# Altium PCB PCB1.PcbDoc
Units mil, origin at the board's own origin, x right, y up, seen from the top; angles counter-clockwise.
Board outline 3937.01 x 3937.01 mil, 2 copper layers (Top Layer, Bottom Layer); 44 components, 36 nets, 195 pads, 3 vias.
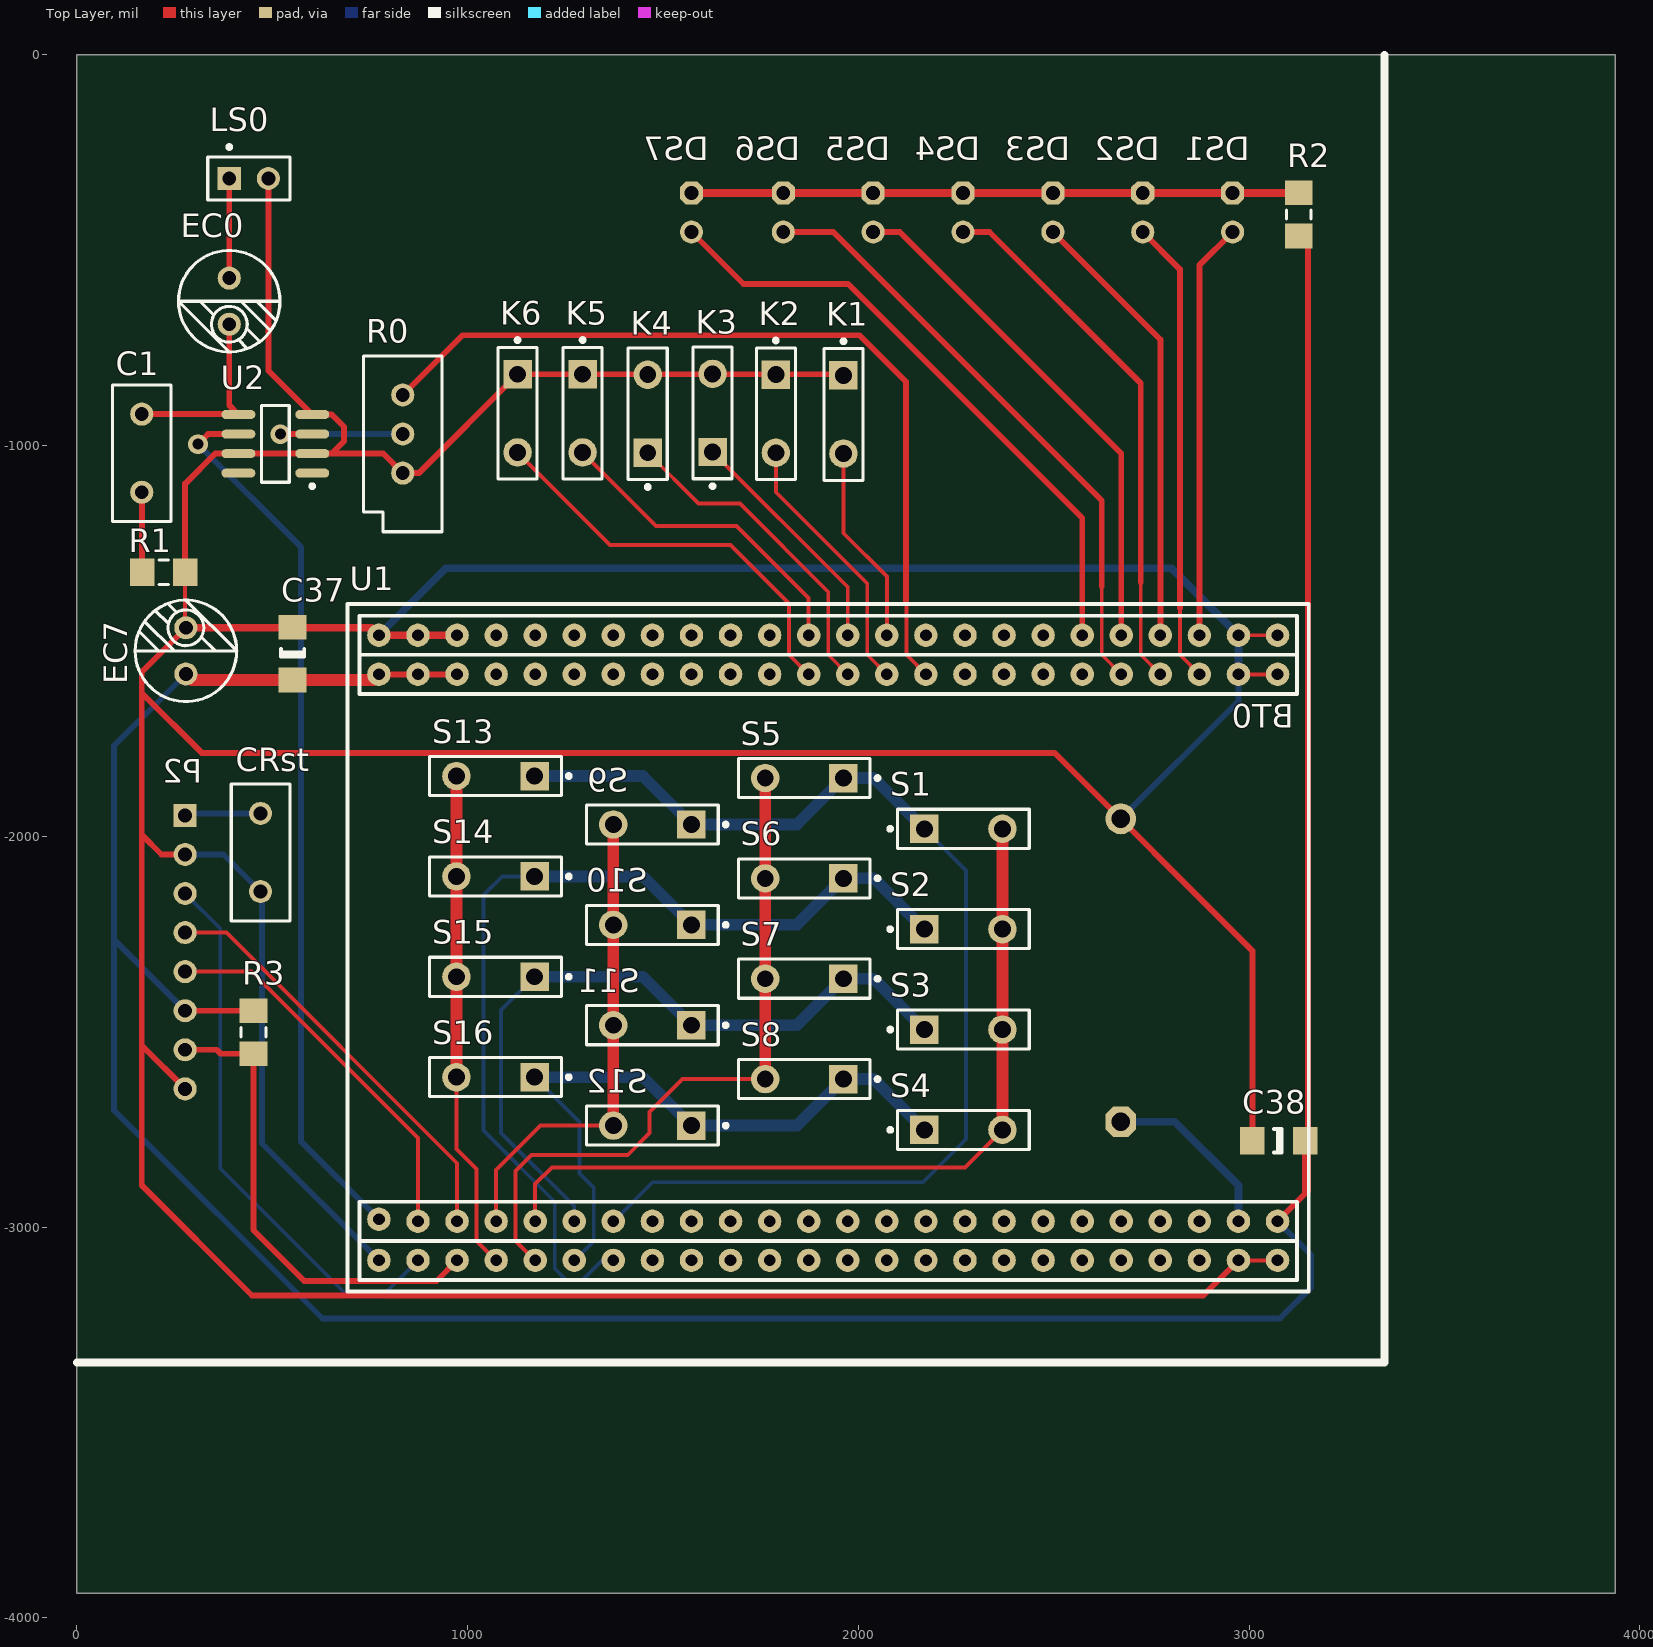
[diagram p0: Top Layer view]
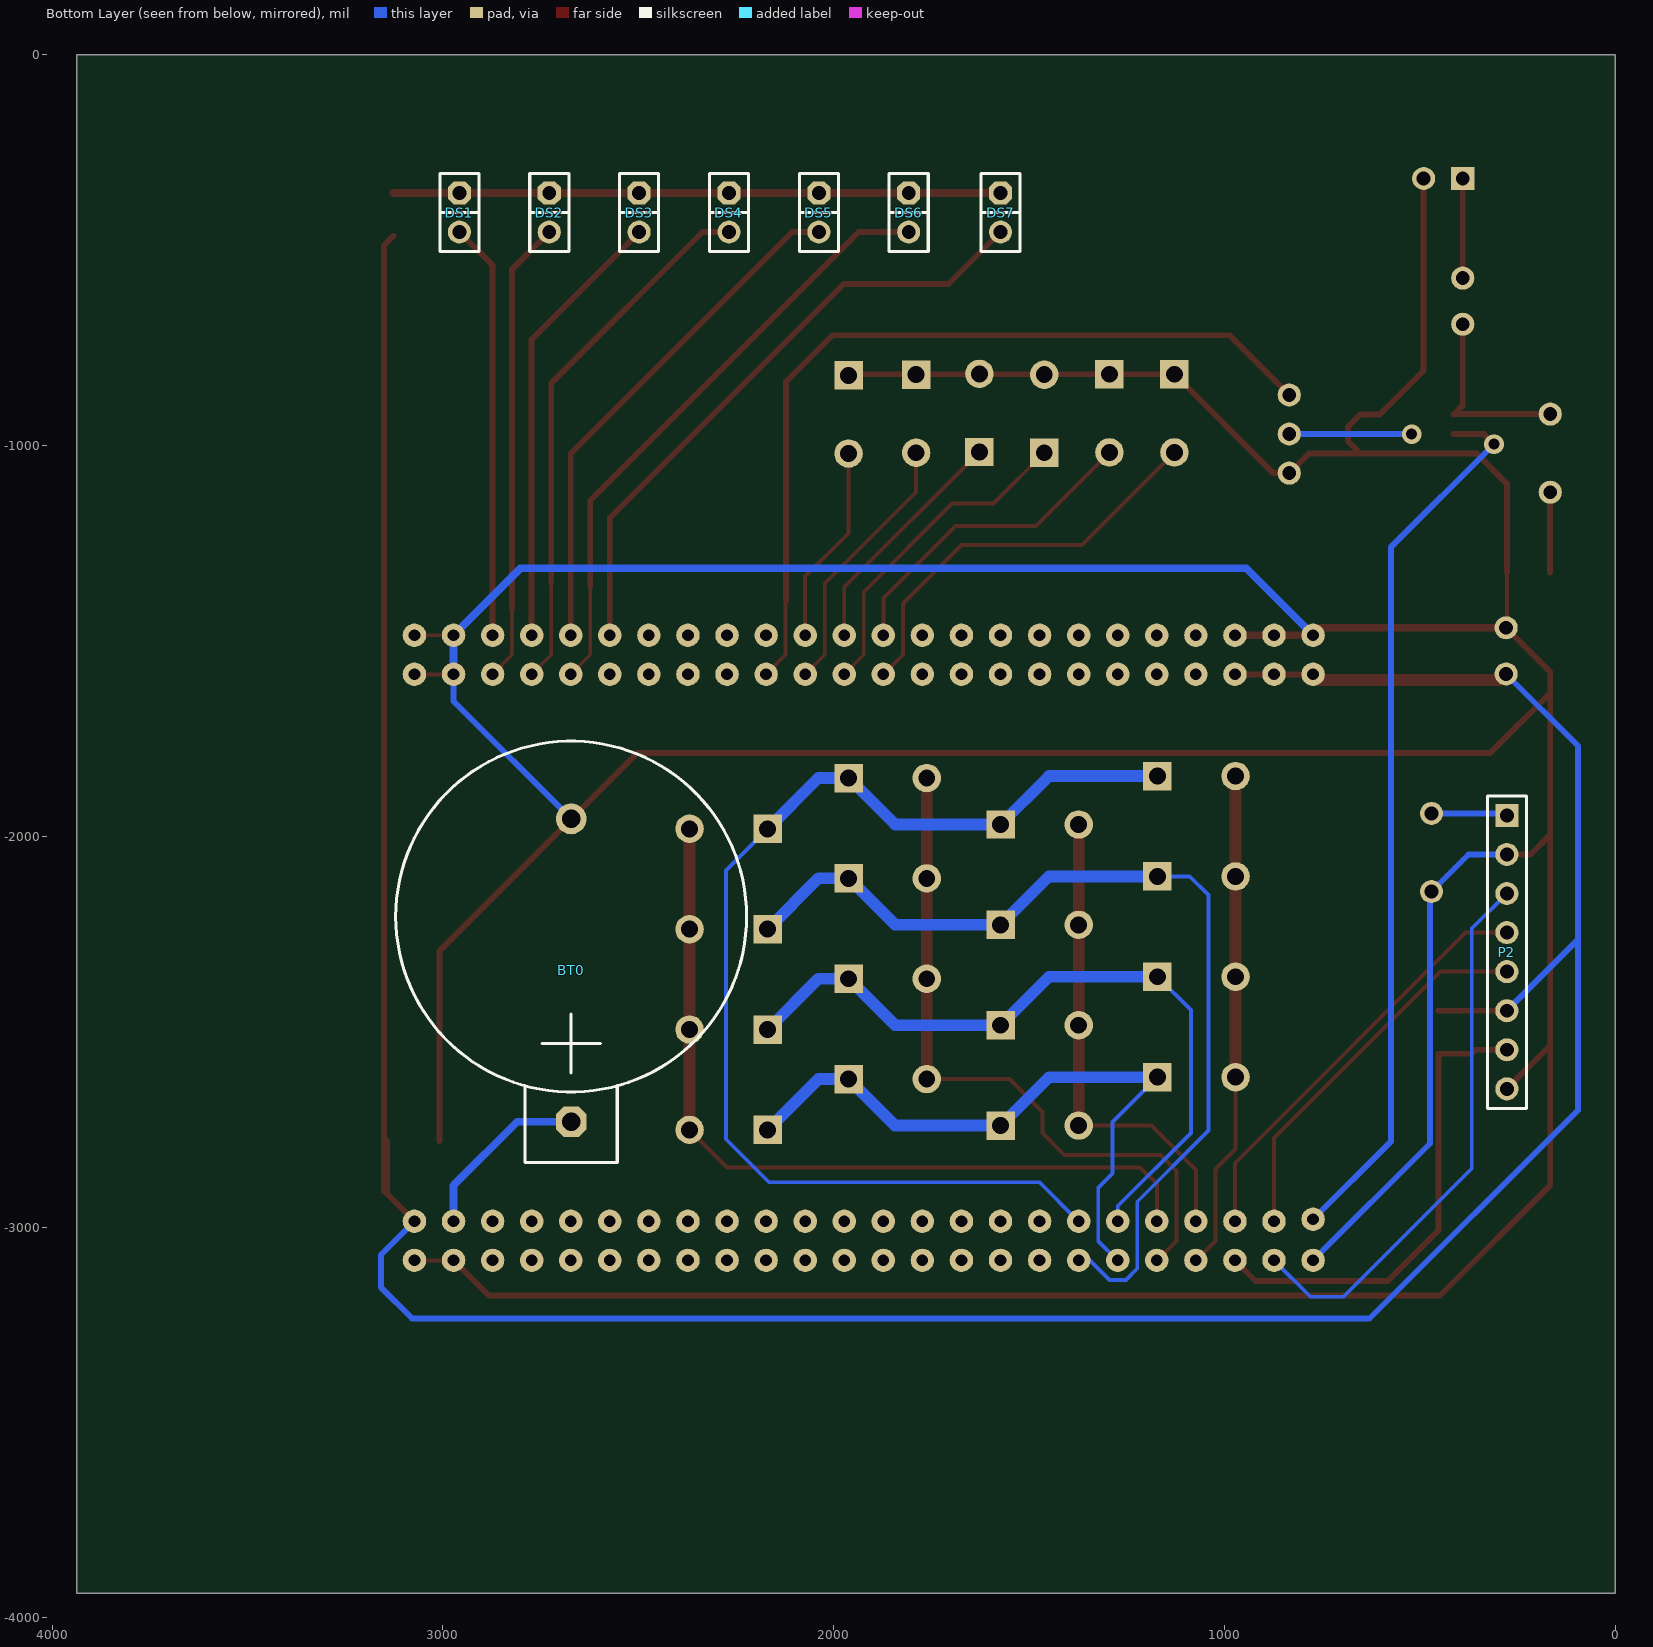
[diagram p1: Bottom Layer view, seen from below]

## Layer stack, top to bottom
Top Layer: signal copper 1.4
Dielectric: dielectric 12.6, FR-4, Dk 4.8
Bottom Layer: signal copper 1.4

## Board outline
0,0 0,-3937.01 3937.01,-3937.01 3937.01,0

## Design rules (kind name [scope] priority, off if disabled: settings)
Clearance [All] p1: gap=15
PolygonConnect [All] p1: connectstyle=Relief reliefconductorwidth=10 reliefentries=4 polygonreliefangle="90 Angle" airgapwidth=10
RoutingVias [All] p1: holewidth=28 width=50 viastyle="Through Hole" minholewidth=28 minwidth=50 maxholewidth=28 maxwidth=50
SolderMaskExpansion [All] p1: expansion=4
Width [All] p1: maxlimit=100 minlimit=10 preferedwidth=15
Width Width_1 [InNet('+5')] p2: maxlimit=100 minlimit=10 preferedwidth=30
Width Width_2 [InNet('+3')] p3: maxlimit=100 minlimit=10 preferedwidth=30
28 further rules are at their usual default settings.

## Components (designator, comment, footprint, x,y, rotation, side; value= is the part's Value field where it differs from the comment)
BT0 "Battery" CR2032 2672,-2730.41 r90 bottom
C1 "0.051uf" RAD-0.2 166,-919.41 r270 top
C37 "0.1uF" CC3216 552,-1532.41 r90 top
C38 "0.1uF" CC3216 3076,-2779.41 r180 top
CRst "104" RAD-0.2 470,-2141.41 r90 top
DS1 "LED" LED-2 2958,-403.41 r270 bottom
DS2 "LED" LED-2 2728,-403.41 r270 bottom
DS3 "LED" LED-2 2498,-403.41 r270 bottom
DS4 "LED" LED-2 2268,-403.41 r270 bottom
DS5 "LED" LED-2 2038,-403.41 r270 bottom
DS6 "LED" LED-2 1808,-403.41 r270 bottom
DS7 "LED" LED-2 1573,-403.41 r270 bottom
EC0 "220uF/16V" RB3.0 390,-630.41 r90 top
EC7 "220uF/16V" RB3.0 279,-1525.41 r270 top
K1 "UP" SPST-2 1962,-920.41 r270 top
K2 "DOWD" SPST-2 1789,-918.41 r270 top
K3 "LEFT" SPST-2 1627,-916.41 r90 top
K4 "RIGHT" SPST-2 1461,-918.41 r90 top
K5 "ESC" SPST-2 1294.3,-917.41 r270 top
K6 "OK" SPST-2 1127.88,-917.41 r270 top
LS0 "Speaker" PIN2 390,-316.41 r0 top
P2 "NOKIA5110" HDR1X8 277,-1946.41 r270 bottom
R0 "10K" VR-3296 834,-1070.41 r270 top
R1 "10Ω" CR1206 222,-1324.41 r0 top
R2 "470Ω" CR1206 3127,-408.41 r90 top
R3 "10k" CR1206 452,-2501.41 r270 top
S1 "SW-PB" SPST-2 2269,-1980.84 r0 top
S2 "SW-PB" SPST-2 2269,-2237.7 r0 top
S3 "SW-PB" SPST-2 2269,-2494.55 r0 top
S4 "SW-PB" SPST-2 2269,-2751.41 r0 top
S5 "SW-PB" SPST-2 1861.82,-1850.84 r180 top
S6 "SW-PB" SPST-2 1861.82,-2107.7 r180 top
S7 "SW-PB" SPST-2 1861.82,-2364.55 r180 top
S8 "SW-PB" SPST-2 1861.82,-2621.41 r180 top
S9 "SW-PB" SPST-2 1473,-1969.84 r180 top
S10 "SW-PB" SPST-2 1473,-2226.7 r180 top
S11 "SW-PB" SPST-2 1473,-2483.55 r180 top
S12 "SW-PB" SPST-2 1473,-2740.41 r180 top
S13 "SW-PB" SPST-2 1071.49,-1845.84 r180 top
S14 "SW-PB" SPST-2 1071.49,-2102.7 r180 top
S15 "SW-PB" SPST-2 1071.49,-2359.55 r180 top
S16 "SW-PB" SPST-2 1071.49,-2616.41 r180 top
U1 "STM32F103RCT6" STM32F103RCT6 3073,-2985.41 r90 top (schematic designator U?)
U2 "LM386M-1" M08A_N 508,-995.41 r180 top

## Footprints (in the part's own frame and the unit in brackets; to place one, negate y for a bottom-side part, rotate by r counter-clockwise, add the part's x,y. Pads: shape width x height; smd on the part's side, far side on the other; paste and mask are expansions set on the pad)
CC3216 [mm]
  rect 1.6x1.8 smd: 1(-1.714,0) 2(1.714,0)
  silkscreen extent -0.19,-0.76 0.32,0.76
CR1206 [mm] "Chip Resistor; Body 3.2 x 1.6 mm (LxW typ)"
  rect 1.6x1.8 smd: 1(-1.4,0) 2(1.4,0)
  silkscreen extent -0.3,-0.8 0.3,0.8
CR2032 [mm]
  oct 2x2 hole 1.2: 1(0,0)
  round 2 hole 1.2: 2(19.685,0)
  silkscreen extent -2.67,-11.4 24.74,11.4
HDR1X8 [mm] "Connector; Header; 8 Position"
  rect 1.5x1.5 hole 0.9: 1(0,0)
  round 1.5 hole 0.9: 2(2.54,0) 3(5.08,0) 4(7.62,0) 5(10.16,0) 6(12.7,0) 7(15.24,0) 8(17.78,0)
  silkscreen extent -1.27,-1.27 19.05,1.27
LED-2 [mm]
  oct 1.5x1.5 hole 0.9: 1(-1.27,0)
  round 1.5 hole 0.9: 2(1.27,0)
  silkscreen extent -2.54,-1.27 2.54,1.27
M08A_N [mm] "SOIC, 8-Leads, Body 4.9x3.9mm, Pitch 1.27mm, IPC Medium Density"
  oval 2.2x0.6 smd: 1(-2.4,1.905) 2(-2.4,0.635) 3(-2.4,-0.635) 4(-2.4,-1.905) 5(2.4,-1.905) 6(2.4,-0.635) 7(2.4,0.635) 8(2.4,1.905)
  silkscreen extent -2.53,-2.5 0.9,2.88, body extent -2,-2.5 2,2.5, height 1.75
PIN2 [mm] "Photosensitive Diode; 2 Leads"
  rect 1.5x1.5 hole 0.9: 1(0,0)
  round 1.5 hole 0.9: 2(2.54,0)
  silkscreen extent -1.4,-1.4 3.94,2.17
RAD-0.2 [mm]
  round 1.5 hole 0.9: 1(0,0) 2(5.08,0)
  silkscreen extent -1.91,-1.91 6.98,1.91
RB3.0 [mm]
  round 1.5 hole 0.9: 1(1.5,0) 2(-1.5,0)
  silkscreen extent -3.3,-3.3 3.3,3.3
SPST-2 [mm] "Switch; 2 Leads"
  rect 1.85x1.85 hole 1.1: 1(-2.54,0)
  round 1.85 hole 1.1: 2(2.54,0)
  silkscreen extent -4.89,-1.27 4.28,1.27
STM32F103RCT6 [mil]
  round 60 hole 30: 1(0,0) 2(-100,0) 3(0,100) 4(-100,100) 5(0,200) 6(-100,200) 7(0,300) 8(-100,300) 9(0,400) 10(-100,400) 11(0,500) 12(-100,500) 13(0,600) 14(-100,600) 15(0,700) 16(-100,700) 17(0,800) 18(-100,800) 19(0,900) 20(-100,900) 21(0,1000) 22(-100,1000) 23(0,1100) 24(-100,1100) 25(0,1200) 26(-100,1200) 27(0,1300) 28(-100,1300) 29(0,1400) 30(-100,1400) 31(0,1500) 32(-100,1500) 33(0,1600) 34(-100,1600) 35(0,1700) 36(-100,1700) 37(0,1800) 38(-100,1800) 39(0,1900) 40(-100,1900) 41(0,2000) 42(-100,2000) 43(0,2100) 44(-100,2100) 45(0,2200) 46(-100,2200) 47(5,2300) 48(-100,2300) 49(1500,0) 50(1400,0) 51(1500,100) 52(1400,100) 53(1500,200) 54(1400,200) 55(1500,300) 56(1400,300) 57(1500,400) 58(1400,400) 59(1500,500) 60(1400,500) 61(1500,600) 62(1400,600) 63(1500,700) 64(1400,700) 65(1500,800) 66(1400,800) 67(1500,900) 68(1400,900) 69(1500,1000) 70(1400,1000) 71(1500,1100) 72(1400,1100) 73(1500,1200) 74(1400,1200) 75(1500,1300) 76(1400,1300) 77(1500,1400) 78(1400,1400) 79(1500,1500) 80(1400,1500) 81(1500,1600) 82(1400,1600) 83(1500,1700) 84(1400,1700) 85(1500,1800) 86(1400,1800) 87(1500,1900) 88(1400,1900) 89(1500,2000) 90(1400,2000) 91(1500,2100) 92(1400,2100) 93(1500,2200) 94(1400,2200) 95(1500,2300) 96(1400,2300)
  silkscreen extent -180,-80 1580,2380
VR-3296 [mm]
  round 1.5 hole 0.9: 1(0,0) 2(-2.54,0) 3(-5.08,0)
  silkscreen extent -7.62,-2.54 3.81,2.54

## Part data
BT0: library part CR2032
C1 C37 C38 CRst: library part Cap, "Capacitor"
EC0 EC7: library part "Cap Pol1", "Polarized Capacitor (Radial)"
K1 K2 K3 K4 K5 K6: library part SW-PB, "Switch"
LS0: "Loudspeaker"
P2: library part "Header 8", "Header, 8-Pin"
R0: library part Pot, "Potentiometer"
R1 R2 R3: library part Res2, "Resistor"
S1 S2 S3 S4 S5 S6 S7 S8 S9 S10 S11 S12 S13 S14 S15 S16: "Switch"
U1: library part STM32F103RC
U2: "Low Voltage Audio Power Amplifier"

## Via types
v1: diameter 50, hole 28, Top Layer to Bottom Layer, 3 vias

## Nets (pads, with @x,y where several pads share a name; then routed paths per layer and width w, separated by ;. In a path a pad name is that pad's centre, name@x,y a point inside that pad or via, vN(x,y) a via of type N, cw(c..) or ccw(c..) an arc to the next point about the centre after c; other vN are vias at no path point)
+3: C37.1 C38.1 EC7.1 P2.6 R2.1 R3.1 U1.1 U1.92 U1.94 U1.96 | length 8631.6
  Top Layer w15: P2.6 452,-2446.41 R3.1 ; U1.96 U1.94 U1.92 ; R2.1 3151,-487.53 3151,-2907.41 U1.1 3143.5,-2914.91 C38.1
  Top Layer w30: EC7.1@294.5,-1599.91 C37.1 758.5,-1599.91 U1.96
  Bottom Layer w15: P2.6 95.59,-2265 95,-2265 ; EC7.1 95,-1768.47 95,-2265 ; U1.1 3159,-3071.41 3159,-3154.41 3079,-3234.41 628.41,-3234.41 95,-2701 95,-2265
  other v1: 279,-1584.41
+5: U1.47 U2.6 | length 2290.1
  Top Layer w15: v1(310,-996.41) 336,-970.41 U2.6
  Bottom Layer w15: v1(310,-996.41) 574,-1260.41 574,-2781.41 U1.47
BL: P2.7 R3.2 U1.44 | length 1227.2
  Top Layer w15: P2.7 358,-2546.41 368.12,-2556.53 R3.2 452,-3008 581.91,-3137.91 920.5,-3137.91 U1.44
CLK: P2.5 U1.45 | length 985.6
  Top Layer w10: P2.5 447.33,-2346.41 873,-2772.08 U1.45
DC: P2.3 U1.46 | length 1421.4
  Bottom Layer w10: P2.3 367,-2236.41 367,-2850 695.41,-3178.41 780,-3178.41 U1.46
DIN: P2.4 U1.43 | length 1089.2
  Top Layer w10: P2.4 382.69,-2246.41 973,-2836.72 U1.43
GND: BT0.2 C37.2 C38.2 CRst.1 EC7.2 K1.1 K2.1 K3.2 K4.2 K5.1 K6.1 LS0.2 P2.2 P2.8 R0.1 R1.2 U1.2 U1.4 U1.48 U1.49 U1.50 U1.51 U1.52 U1.91 U1.93 U1.95 U2.2 U2.4 U2.7 | length 16703.7
  Top Layer w10: R1.2 277.12,-1464.47 EC7.2 ; U1.4 U1.2 ; U1.52 U1.50 ; U1.51 U1.49
  Top Layer w15: 166,-1996 216.41,-2046.41 P2.2 ; 168,-1635 319.41,-1786.41 2502,-1786.41 3008.5,-2292.91 C38.2 ; P2.8 166,-2535.41 ; R1.2 277.12,-1097.29 354,-1020.41 U2.7 U2.2 652,-1020.41 ; EC7.2 166,-1579.35 166,-2535.41 ; LS0.2 490,-807.92 U2.4 652,-920.41 684,-952.41 684,-988.41 652,-1020.41 ; C37.2 652,-1464.91 ; K1.1 1959,-817.41 K5.1 K6.1 874.88,-1070.41 R0.1 784,-1020.41 652,-1020.41 ; U1.4 2883,-3175.41 448,-3175.41 166,-2893.41 166,-2535.41
  Top Layer w20: EC7.2 753.94,-1466.35 U1.95 U1.93 U1.91
  Bottom Layer w15: P2.2 375,-2046.41 CRst.1 474,-2145.41 474,-2786.41 U1.48 ; BT0.2 2973,-1654.41 U1.52
  Bottom Layer w20: U1.95 944.41,-1314 2801.59,-1314 U1.51 U1.52
K_DOWN: K2.2 U1.70 | length 684.6
  Top Layer w10: K2.2 1789,-1119.41 2023,-1353.41 2023,-1535.41 U1.70
K_ESC: K5.2 U1.73 | length 828.4
  Top Layer w10: K5.2 1482.3,-1205.41 1688.41,-1205.41 1873,-1390 U1.73
K_LEFT: K3.1 U1.71 | length 612.3
  Top Layer w10: K3.1 1973,-1362.41 U1.71
K_OK: K6.2 U1.74 | length 1057.1
  Top Layer w10: K6.2 1364.88,-1254.41 1673,-1254.41 1823,-1404.41 1823,-1535.41 U1.74
K_RIGHT: K4.1 U1.72 | length 841.2
  Top Layer w10: K4.1 1591,-1148.41 1697,-1148.41 1923,-1374.41 1923,-1535.41 U1.72
K_UP: K1.2 U1.69 | length 511
  Top Layer w10: K1.2 1962,-1224.41 2073,-1335.41 U1.69
NetBT0_1: BT0.1 U1.3 | length 460.5
  Bottom Layer w20: BT0.1 2810,-2730.41 2973,-2893.41 U1.3
NetC1_1: C1.1 EC0.2 U2.5 | length 487.2
  Top Layer w15: C1.1 U2.5@412.51,-919.41 ; EC0.2 390,-896.9 U2.5@412.51,-919.41 ; U2.5 U2.5@412.51,-919.41
NetC1_2: C1.2 R1.1 | length 205.4
  Top Layer w15: C1.2 166.88,-1120.29 R1.1
NetDS1_1: DS1.1 DS2.1 DS3.1 DS4.1 DS5.1 DS6.1 DS7.1 R2.2 | length 1554.5
  Top Layer w20: DS7.1 DS6.1 1808,-353.29 DS4.1@2268,-353.29 ; DS4.1 DS4.1@2268,-353.29 ; DS2.1 DS2.1@2728,-353.29 ; R2.2 3126.88,-353.41 DS1.1 2957.88,-353.29 DS2.1@2728,-353.29 ; DS4.1@2268,-353.29 DS2.1@2728,-353.29
NetDS1_2: DS1.2 U1.53 | length 1067.2
  Top Layer w15: U1.53 2873,-538.41 DS1.2
NetDS2_2: DS2.2 U1.54 | length 1192.1
  Top Layer w10: 2823,-1415.41 2823,-1535.41 U1.54
  Top Layer w15: DS2.2 2823,-548.41 2823,-1415.41
NetDS3_2: DS3.2 U1.55 | length 1145.9
  Top Layer w15: DS3.2 2773,-728.41 U1.55
NetDS4_2: DS4.2 U1.56 | length 1381
  Top Layer w10: 2723,-1350.41 2723,-1535.41 U1.56
  Top Layer w15: DS4.2 2336,-453.41 2723,-840.41 2723,-1350.41
NetDS5_2: DS5.2 U1.57 | length 1334.9
  Top Layer w15: DS5.2 2106,-453.41 2673,-1020.41 U1.57
NetDS6_2: DS6.2 U1.58 | length 1565.3
  Top Layer w10: 2623,-1360.41 2623,-1535.41 U1.58
  Top Layer w15: DS6.2 1936,-453.41 2623,-1140.41 2623,-1360.41
NetDS7_2: DS7.2 U1.59 | length 1603.2
  Top Layer w15: DS7.2 1706,-586.41 1974,-586.41 2573,-1185.41 U1.59
NetEC0_1: EC0.1 LS0.1 | length 254.9
  Top Layer w15: EC0.1 LS0.1
NetR0_2: R0.2 U2.3 | length 394.5
  Top Layer w15: v1(521,-970.41) U2.3
  Bottom Layer w15: v1(521,-970.41) R0.2
NetS1_1: S1.1 S5.1 S9.1 S13.1 U1.35 | length 2980.9
  Bottom Layer w10: U1.35 1473,-2885.41 2166,-2885.41 2276,-2775.41 2276,-2087.84 S1.1
  Bottom Layer w30: S13.1 1449,-1845.84 S9.1 1842.82,-1969.84 S5.1 2039,-1850.84 S1.1
NetS1_2: S1.2 S2.2 S3.2 S4.2 U1.39 | length 2119.1
  Top Layer w10: U1.39 1173,-2890.41 1216,-2847.41 2273,-2847.41 S4.2
  Top Layer w30: S4.2 S3.2 S2.2 S1.2
NetS2_1: S2.1 S6.1 S10.1 S14.1 U1.36 | length 2516.2
  Bottom Layer w10: S14.1 1088.71,-2102.7 1041,-2150.41 1041,-2753.41 1223,-2935.41 1223,-3106.12 1252.29,-3135.41 1293.71,-3135.41 1343.71,-3085.41 U1.36
  Bottom Layer w30: S14.1 1449,-2102.7 S10.1 1842.82,-2226.7 S6.1 2039,-2107.7 S2.1
NetS3_1: S3.1 S7.1 S11.1 S15.1 U1.37 | length 1890.7
  Bottom Layer w10: S15.1 1086,-2445.04 1086,-2759.41 1273,-2946.41 U1.37
  Bottom Layer w30: S15.1 1449,-2359.55 S11.1 1842.82,-2483.55 S7.1 2039,-2364.55 S3.1
NetS4_1: S4.1 S8.1 S12.1 S16.1 U1.38 | length 1704.5
  Bottom Layer w10: S16.1 1286,-2730.92 1286,-2863.41 1323,-2900.41 1323,-3035.41 U1.38
  Bottom Layer w30: S16.1 1449,-2616.41 S12.1 1842.82,-2740.41 S8.1 2039,-2621.41 S4.1
NetS5_2: S5.2 S6.2 S7.2 S8.2 U1.40 | length 1788.1
  Top Layer w10: U1.40 1123,-3035.41 1123,-2856.41 1164,-2815.41 1410,-2815.41 1466,-2759.41 1466,-2705.41 1550,-2621.41 S8.2
  Top Layer w30: S8.2 S7.2 S6.2 S5.2
NetS9_2: S9.2 S10.2 S11.2 S12.2 U1.41 | length 1248.8
  Top Layer w10: U1.41 1073,-2854.41 1187,-2740.41 S12.2
  Top Layer w30: S12.2 S11.2 S10.2 S9.2
NetS13_2: S13.2 S14.2 S15.2 S16.2 U1.42 | length 1281.6
  Top Layer w10: S16.2 971.49,-2799.86 1023,-2851.37 1023,-3035.41 U1.42
  Top Layer w30: S16.2 S15.2 S14.2 S13.2
RST: CRst.2 P2.1 | length 198
  Bottom Layer w15: P2.1 277,-1941.41 CRst.2
VIN: R0.3 U1.68 | length 2170.8
  Top Layer w10: 2122,-1397.41 2123,-1398.41 2123,-1535.41 U1.68
  Top Layer w15: R0.3 987,-717.41 2003,-717.41 2122,-836.41 2122,-1397.41
pads on no net: U1.5 U1.6 U1.7 U1.8 U1.9 U1.10 U1.11 U1.12 U1.13 U1.14 U1.15 U1.16 U1.17 U1.18 U1.19 U1.20 U1.21 U1.22 U1.23 U1.24 U1.25 U1.26 U1.27 U1.28 U1.29 U1.30 U1.31 U1.32 U1.33 U1.34 U1.60 U1.61 U1.62 U1.63 U1.64 U1.65 U1.66 U1.67 U1.75 U1.76 U1.77 U1.78 U1.79 U1.80 U1.81 U1.82 U1.83 U1.84 U1.85 U1.86 U1.87 U1.88 U1.89 U1.90 U2.1 U2.8

## Silkscreen, mask and mechanical layers (free items; w line width, h text height)
Top Overlay:
  lines w20: 0,-3346.46 3346.46,-3346.46 3346.46,0